# Altium PCB Charger.PcbDoc
Units mil, origin at the board's own origin, x right, y up, seen from the top; angles counter-clockwise.
Board outline 18000 x 5125 mil, 2 copper layers (Top Layer, Bottom Layer); 95 components, 66 nets, 397 pads, 99 vias.
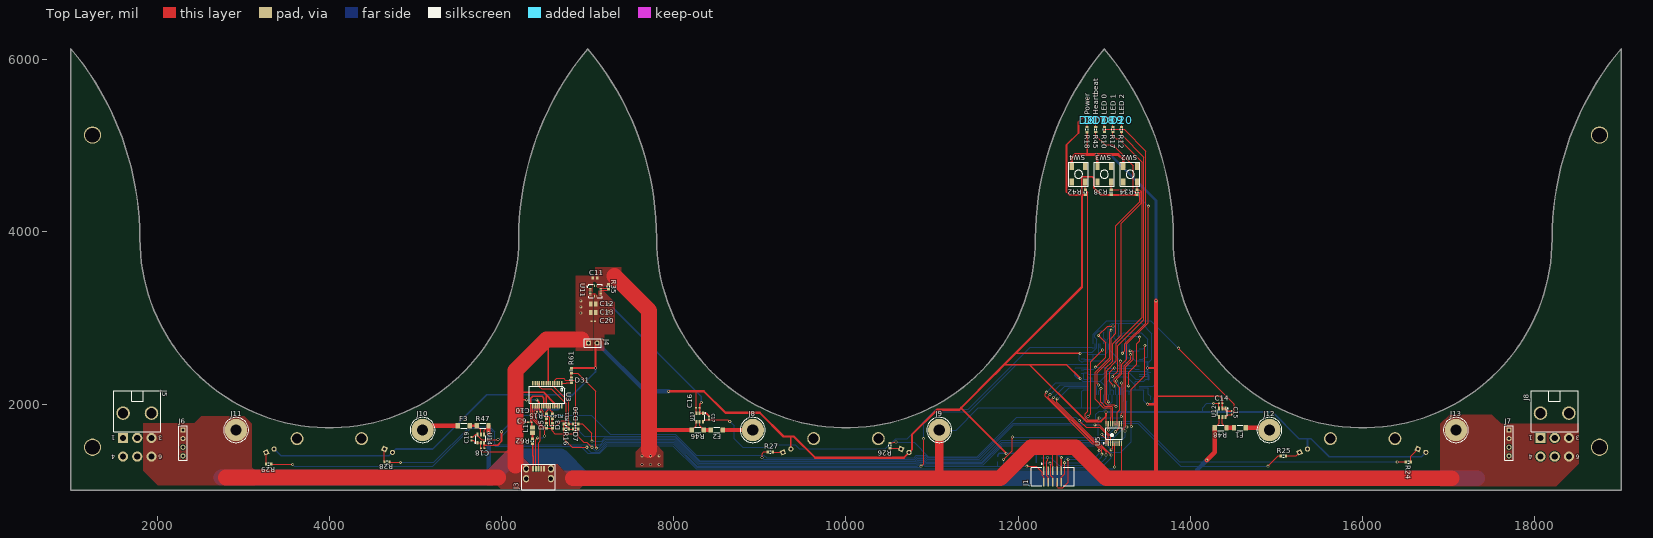
[diagram p0: Top Layer view]
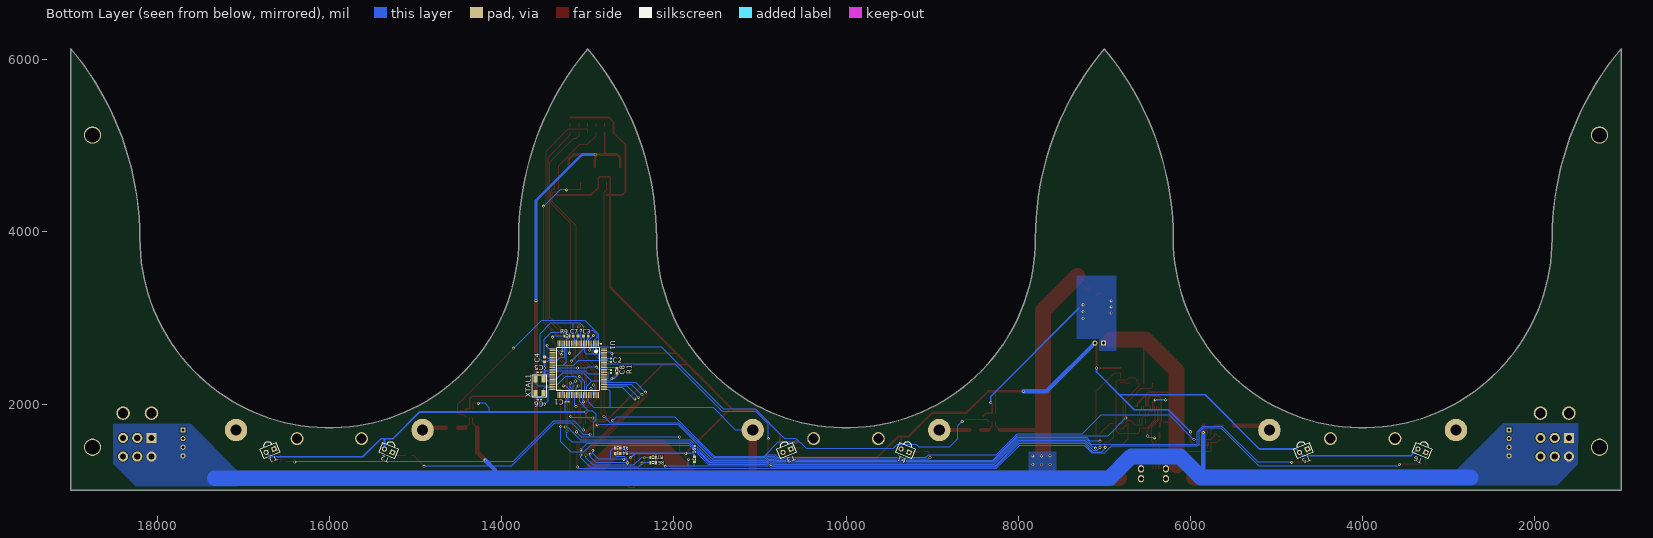
[diagram p1: Bottom Layer view, seen from below]

## Layer stack, top to bottom
Top Layer: signal copper 1.4
Dielectric: core 12.6, FR-4, Dk 4.8
Bottom Layer: signal copper 1.4

## Board outline
343 vertices, not listed, extent 1000,1000 19000,6125

## Design rules (kind name [scope] priority, off if disabled: settings)
Clearance "Via to Pad Clearance" [(InPadClass('All Pads')) vs IsVia] p1: gap=20
Clearance [All] p2: gap=8
ComponentClearance [All] p1: gap=10 collisioncheckmode=3 verticalgap=10 showdistances=TRUE
HoleSize [All] p1: absolutevalues=TRUE maxlimit=250 minlimit=20 maxpercent=80.000 minpercent=20.000
MinimumAnnularRing [All] p1: minimumring=7
MinimumSolderMaskSliver [All] p1: minsoldermaskwidth=0
PolygonConnect PolygonConnect_2 [All] p1: connectstyle=Direct reliefconductorwidth=10 reliefentries=4 polygonreliefangle="90 Angle"
PolygonConnect PolygonConnect_1 [InNet('5V')] p2 off: connectstyle=Direct reliefconductorwidth=10 reliefentries=4 polygonreliefangle="90 Angle"
PolygonConnect [All] p3 off: connectstyle=Relief reliefconductorwidth=10 reliefentries=4 polygonreliefangle="90 Angle"
RoutingVias [All] p1: holewidth=20 width=35 viastyle="Through Hole" minholewidth=20 minwidth=35 maxholewidth=20 maxwidth=35
SMDNeckDown [All] p1: percent=100.000
ShortCircuit [All] p1: allowed=TRUE
SilkToSilkClearance [All] p1: silktosilkclearance=0.5
SilkscreenOverComponentPads [All] p1: minsilkscreentomaskgap=1
SolderMaskExpansion [All] p1: expansion=4
Width "Schematic Width Constraint_10" [InNet('NetF1_1')] p1: maxlimit=100 minlimit=8 preferedwidth=30 minimp=50.000000 maximp=50.000000 favimp=50.000000
Width "Schematic Width Constraint_4" [InNet('NetF3_1')] p2: maxlimit=100 minlimit=8 preferedwidth=30 minimp=50.000000 maximp=50.000000 favimp=50.000000
Width "Schematic Width Constraint_11" [InNet('5V_STATION_0')] p3: maxlimit=100 minlimit=15 preferedwidth=30 minimp=50.000000 maximp=50.000000 favimp=50.000000
Width "Schematic Width Constraint_9" [InNet('NetF2_1')] p4: maxlimit=100 minlimit=8 preferedwidth=30 minimp=50.000000 maximp=50.000000 favimp=50.000000
Width "Schematic Width Constraint_3" [InNet('5V_STATION_2')] p5: maxlimit=100 minlimit=15 preferedwidth=30 minimp=50.000000 maximp=50.000000 favimp=50.000000
Width "Schematic Width Constraint_8" [InNet('5V')] p6: maxlimit=250 minlimit=8 preferedwidth=185 minimp=50.000000 maximp=50.000000 favimp=50.000000
Width "Schematic Width Constraint_7" [InNet('GND')] p7: maxlimit=185 minlimit=8 preferedwidth=50 minimp=50.000000 maximp=50.000000 favimp=50.000000
Width "Schematic Width Constraint_6" [InNet('3.3V')] p8: maxlimit=100 minlimit=8 preferedwidth=20 minimp=50.000000 maximp=50.000000 favimp=50.000000
Width "Schematic Width Constraint_5" [InNet('5V_STATION_1')] p9: maxlimit=100 minlimit=15 preferedwidth=30 minimp=50.000000 maximp=50.000000 favimp=50.000000
Width "Schematic Width Constraint_2" [InNet('NetJ3_1')] p10: maxlimit=15 minlimit=8 preferedwidth=8 minimp=50.000000 maximp=50.000000 favimp=50.000000
Width "Schematic Width Constraint_1" [InNet('GND')] p11: maxlimit=15 minlimit=8 preferedwidth=8 minimp=50.000000 maximp=50.000000 favimp=50.000000
Width "Schematic Width Constraint" [InNet('5VUSB')] p12: maxlimit=15 minlimit=8 preferedwidth=8 minimp=50.000000 maximp=50.000000 favimp=50.000000
Width [All] p13: maxlimit=30 minlimit=8 preferedwidth=8 minimp=50.000000 maximp=50.000000 favimp=50.000000
22 further rules are at their usual default settings.

## Classes and differential pairs
component class CPU: C1 C2 C3 C4 C5 C6 C7 C8 J1 R1 R4 R5 R6 R7 R9 R60 U1 XTAL1
component class IRComms: R24 R25 R26 R27 R28 R29 T1 T2 T3 T4 T5 T6
component class LEDsAndButtons: D17 D18 D19 D20 R10 R12 R17 R34 R38 R42 R45 SW2 SW3 SW4
component class PowerAndSense: C11 C12 C13 C14 C15 C16 C17 C18 C19 C20 D8 F1 F2 F3 J4 J5 J6 J7 J8 J9 J10 J11 J12 J13 R18 R35 R46 R47 R48 U11 U12 U13 U14
component class USBHeaders: C9 C10 D3 D5 D7 D30 D31 J3 L1 R11 R14 R15 R16 R61 R62 U3

## Components (designator, comment, footprint, x,y, rotation, side; value= is the part's Value field where it differs from the comment)
C1 "" CAPC1005L 13240,2030 r0 bottom
C2 "" CAPC1005L 12730,2510 r270 bottom
C3 "" CAPC1608L 13020,2790 r180 bottom
C4 "" CAPC1608L 13500,2520 r90 bottom
C5 "" CAPC1005L 13560,2370 r0 bottom
C6 "" CAPC1005L 13560,2050 r180 bottom
C7 "" CAPC1608L 13140,2790 r180 bottom
C8 "" CAPC1005L 12730,2380 r90 bottom
C9 "" CAPC1005L 6330,1790 r0 top
C10 "" CAPC1005L 6430,1910 r180 top
C11 "" CAPC1608L 7085.31,3464.84 r0 top
C12 "" CAPC2012L 7065.31,3164.84 r0 top
C13 "" CAPC2012L 7065.31,3064.84 r0 top
C14 "" CAPC1005L 14350,2010 r180 top
C15 "" CAPC1005L 14480,1900 r270 top
C16 "" CAPC1005L 8280,1960 r180 top
C17 "" CAPC1005L 8410,1840 r270 top
C18 "" CAPC1005L 5780,1490 r0 top
C19 "" CAPC1005L 5650,1600 r90 top
C20 "" CAPC1005L 7065.31,2964.84 r0 top
D3 "TXLED" SurfaceMount(603) 6590,1750 r90 top
D5 "RXLED" SurfaceMount(603) 6520,1750 r90 top
D7 "Diode" SurfaceMount(603) 6860,1710 r180 top
D8 "Power" SurfaceMount(603) 12800,5299.53 r270 top
D17 "White" SurfaceMount(603) 12900,5300 r270 top
D18 "Red" SurfaceMount(603) 13000,5300 r270 top
D19 "Red" SurfaceMount(603) 13100,5300 r270 top
D20 "Red" SurfaceMount(603) 13200,5300 r270 top
D30 "Diode" SurfaceMount(603) 6860,1770 r180 top
D31 "Diode" SurfaceMount(603) 6810,2280 r90 top
F1 "PTC" ERJ8G-1206 14575,1725 r0 top
F2 "PTC" ERJ8G-1206 8500,1700 r0 top
F3 "PTC" ERJ8G-1206 5560,1750 r180 top
J1 "JTAG" JTAG-10 12400,1160 r180 top locked
J3 "USB" "USB Minib (thru-hole)" 6430,1250 r90 top
J4 "External Power" HDR1X2 7010,2710 r0 top
J5 "Power Connector" MOLEX_MINI-FIT_JR_5569_2X3_HORIZ 1770,1500 r180 top
J6 "5V_EXT_1" HDR1X4 2300,1700 r270 top
J7 "5V_EXT_2" HDR1X4 17700,1700 r270 top
J8 "Charge Prong" CHARGING_PRONG 8917,1700 r0 top locked
J8 "Power Connector" MOLEX_MINI-FIT_JR_5569_2X3_HORIZ 18230,1500 r180 top
J9 "Charge Prong" CHARGING_PRONG 11083,1700 r0 top locked
J10 "Charge Prong" CHARGING_PRONG 5083,1700 r0 top locked
J11 "Charge Prong" CHARGING_PRONG 2917,1700 r0 top locked
J12 "Charge Prong" CHARGING_PRONG 14917,1700 r0 top locked
J13 "Charge Prong" CHARGING_PRONG 17083,1700 r0 top locked
L1 "Inductor" INDC2012L 6360,1700 r90 top
R1 "Res3" RESC1608L 12660,2390 r90 bottom
R4 "Res3" RESC1608L 12650,1430 r180 bottom
R5 "Res3" RESC1608L 12650,1490 r180 bottom
R6 "Res3" RESC1608L 12240,1320 r180 bottom
R7 "Res3" RESC1608L 12240,1380 r180 bottom
R9 "Res3" RESC1608L 13240,2790 r180 bottom
R10 "Res3" RESC1608L 13000,5190 r90 top
R11 "Res3" RESC1608L 6750,1770 r0 top
R12 "Res3" RESC1608L 13200,5190 r90 top
R14 "" RESC1608L 6590,1860 r270 top
R15 "" RESC1608L 6520,1860 r270 top
R16 "Res3" RESC1608L 6750,1710 r0 top
R17 "Res3" RESC1608L 13100,5190 r90 top
R18 "Res3" RESC1608L 12800,5189.53 r90 top
R24 "Res3" RESC1608L 16530,1330 r180 top
R25 "Res3" RESC1608L 15080,1400 r180 top
R26 "Res3" RESC1608L 10510,1520 r90 top
R27 "Res3" RESC1608L 9120,1445 r180 top
R28 "Res3" RESC1608L 4670,1330 r0 top
R29 "Res3" RESC1608L 3295,1305 r0 top
R34 "Res3" RESC1608L 13380,4460 r270 top
R35 "Res3" RESC1608L 7240.31,3364.84 r90 top
R38 "Res3" RESC1608L 13080,4460 r270 top
R42 "Res3" RESC1608L 12780,4460 r270 top
R45 "Res3" RESC1608L 12900,5190 r90 top
R46 "Sense Resistor" ERJ8G-1206 8280,1700 r180 top
R47 "Sense Resistor" ERJ8G-1206 5780,1750 r0 top
R48 "Sense Resistor" ERJ8G-1206 14350,1725 r180 top
R60 "Res3" RESC1608L 11760,1360 r90 bottom
R61 "Res3" RESC1608L 6810,2390 r270 top
R62 "Res3" RESC1608L 6360,1570 r90 top
SW2 "BUTTON_0" SwitchTall-TL330 13300,4670 r90 top
SW3 "BUTTON_1" SwitchTall-TL330 13000,4670 r90 top
SW4 "BUTTON_2" SwitchTall-TL330 12700,4670 r90 top
T1 "LN54" LN54 16687,1460 r247.5 bottom locked
T2 "LN54" LN54 15313,1460 r292.5 bottom locked
T3 "LN54" LN54 10687,1460 r247.5 bottom locked
T4 "LN54" LN54 9313,1460 r292.5 bottom locked
T5 "LN54" LN54 4687,1460 r247.5 bottom locked
T6 "LN54" LN54 3313,1460 r292.5 bottom locked
U1 "LM3S8962" LQFP-100 13110,2405 r270 bottom locked
U3 "FT232RL" SSOP-28 6530,2110 r180 top locked
U5 "SN74AHCT595" TSSOP-16 13110,1660 r90 top locked
U11 "EP53A8HQI" "QFN-16 - EP53A8xQI Package" 7090.31,3314.84 r0 top
U12 "SC310A" SOT-23-6 14370,1900 r270 top
U13 "SC310A" SOT-23-6 8300,1845 r270 top
U14 "SC310A" SOT-23-6 5760,1600 r90 top
XTAL1 "8MHz" CRYSTAL 13560,2211 r270 bottom

## Footprints (in the part's own frame and the unit in brackets; to place one, negate y for a bottom-side part, rotate by r counter-clockwise, add the part's x,y. Pads: shape width x height; smd on the part's side, far side on the other; paste and mask are expansions set on the pad)
CAPC1005L [mm] "Chip Capacitor, Body 1.0x0.5mm, IPC High Density"
  rect 0.6x0.5 smd: 1(-0.5,0) 2(0.5,0)
CAPC1608L [mm] "Chip Capacitor, Body 1.6x0.8mm, IPC High Density"
  rect 0.8x0.9 smd: 1(-0.7,0) 2(0.7,0)
CAPC2012L [mm] "Chip Capacitor, Body 2.0x1.3mm, IPC High Density"
  rect 1.1x1.4 smd: 1(-0.75,0) 2(0.75,0)
CHARGING_PRONG [mil] "Plated Charging Screw Hole, 3.2766mm Hole Dia., 6.604mm Pad Dia."
  round 260 hole 129: 1(0,0)
  silkscreen extent -146,-146 146,146
CRYSTAL [mm]
  rect 1.8x1.2 smd: 1(-2,-1.213) 2(2,-1.187) 3(2,1.213) 4(-2,1.187)
  silkscreen extent -3.25,-2.11 3.28,2.11
ERJ8G-1206 [mm] "Chip Resistor, Body 3.2x1.6mm, IPC High Density"
  rect 1.3x1.6 smd: 1(-1.75,0) 2(1.75,0)
  silkscreen extent -0.86,-0.79 0.86,0.79
HDR1X2 [mm] "Connector; Header; 2 Position"
  rect 1.5x1.5 hole 0.889: 1(0,0)
  round 1.5 hole 0.889: 2(2.54,0)
  silkscreen extent -1.27,-1.27 3.81,1.27
HDR1X4 [mm] "Connector; Header; 4 Position"
  rect 1.5x1.5 hole 0.889: 1(0,0)
  round 1.5 hole 0.889: 2(2.54,0) 3(5.08,0) 4(7.62,0)
  silkscreen extent -1.27,-1.27 8.89,1.27
INDC2012L [mm] "Chip Inductor, Body 2.0x1.2mm, IPC High Density"
  rect 1.2x1.4 smd: 1(-0.8,0) 2(0.8,0)
JTAG-10 [mm] "Connector, Socket Strip, Double Row, SMT, 20 Position, Vertical, Pitch 2mm, Body 20 x 4 mm (LxW)"
  rect 0.44x2.5 smd: 1(-2.56,-1.73) 2(-2.56,1.73) 3(-1.28,-1.73) 4(-1.28,1.73) 5(0,-1.73) 6(0,1.73) 7(1.28,-1.73) 8(1.28,1.73) 9(2.56,-1.73) 10(2.56,1.73)
  silkscreen extent -6.35,-3.86 6.35,2.77
LN54 [mil]
  rect 60x60 hole 35: 1(0,50)
  round 60 hole 35: 2(0,-50)
  silkscreen extent -110,-100 60,100
LQFP-100 [mm] "100-Pin LQFP Package"
  rect 1.75x0.29 smd: 1(-7.575,6) 2(-7.575,5.5) 3(-7.575,5) 4(-7.575,4.5) 5(-7.575,4) 6(-7.575,3.5) 7(-7.575,3) 8(-7.575,2.5) 9(-7.575,2) 10(-7.575,1.5) 11(-7.575,1) 12(-7.575,0.5) 13(-7.575,0) 14(-7.575,-0.5) 15(-7.575,-1) 16(-7.575,-1.5) 17(-7.575,-2) 18(-7.575,-2.5) 19(-7.575,-3) 20(-7.575,-3.5) 21(-7.575,-4) 22(-7.575,-4.5) 23(-7.575,-5) 24(-7.575,-5.5) 25(-7.575,-6) 51(7.575,-6) 52(7.575,-5.5) 53(7.575,-5) 54(7.575,-4.5) 55(7.575,-4) 56(7.575,-3.5) 57(7.575,-3) 58(7.575,-2.5) 59(7.575,-2) 60(7.575,-1.5) 61(7.575,-1) 62(7.575,-0.5) 63(7.575,0) 64(7.575,0.5) 65(7.575,1) 66(7.575,1.5) 67(7.575,2) 68(7.575,2.5) 69(7.575,3) 70(7.575,3.5) 71(7.575,4) 72(7.575,4.5) 73(7.575,5) 74(7.575,5.5) 75(7.575,6)
  rect 0.29x1.75 smd: 26(-6,-7.575) 27(-5.5,-7.575) 28(-5,-7.575) 29(-4.5,-7.575) 30(-4,-7.575) 31(-3.5,-7.575) 32(-3,-7.575) 33(-2.5,-7.575) 34(-2,-7.575) 35(-1.5,-7.575) 36(-1,-7.575) 37(-0.5,-7.575) 38(0,-7.575) 39(0.5,-7.575) 40(1,-7.575) 41(1.5,-7.575) 42(2,-7.575) 43(2.5,-7.575) 44(3,-7.575) 45(3.5,-7.575) 46(4,-7.575) 47(4.5,-7.575) 48(5,-7.575) 49(5.5,-7.575) 50(6,-7.575) 76(6,7.575) 77(5.5,7.575) 78(5,7.575) 79(4.5,7.575) 80(4,7.575) 81(3.5,7.575) 82(3,7.575) 83(2.5,7.575) 84(2,7.575) 85(1.5,7.575) 86(1,7.575) 87(0.5,7.575) 88(0,7.575) 89(-0.5,7.575) 90(-1,7.575) 91(-1.5,7.575) 92(-2,7.575) 93(-2.5,7.575) 94(-3,7.575) 95(-3.5,7.575) 96(-4,7.575) 97(-4.5,7.575) 98(-5,7.575) 99(-5.5,7.575) 100(-6,7.575)
  silkscreen extent -7.7,-6.3 6.3,6.82
MOLEX_MINI-FIT_JR_5569_2X3_HORIZ [mm] "Molex Mini-Fit Jr 5569 Shrouded Rectangular Male Header, Through Hole, Right Angle, 2X3 Pins with Board Lock"
  rect 3x3 hole 1.8: 1(4.2,-2.75)
  round 3 hole 1.8: 2(0,-2.75) 3(-4.2,-2.75) 4(4.2,2.75) 5(0,2.75) 6(-4.2,2.75)
  round 4 hole 3: c0(-4.2,-10.05) c1(4.2,-10.05)
  silkscreen extent -6.9,-16.65 6.9,-4.5, body extent -6.88,-16.66 6.88,-3.84, height 10
"QFN-16 - EP53A8xQI Package" [mm] "EP53A8xQI Package, QFN, 16-Leads, Body 3.7x4.2mm (max), Pitch 0.50mm, IPC Medium Density"
  oval 0.8x0.25 smd: 1(-1.55,1.25) 2(-1.55,0.75) 3(-1.55,0.25) 4(-1.55,-0.25) 5(-1.55,-0.75) 6(-1.55,-1.25) 9(1.55,-1.25) 10(1.55,-0.75) 11(1.55,-0.25) 12(1.55,0.25) 13(1.55,0.75) 14(1.55,1.25)
  oval 0.25x0.8 smd: 7(-0.25,-1.55) 8(0.25,-1.55) 15(0.25,1.55) 16(-0.25,1.55)
  silkscreen extent -2.51,-2 2,2, body extent -1.5,-1.5 1.5,1.5, height 1.15
RESC1608L [mm] "Chip Resistor, Body 1.6x0.8mm, IPC High Density"
  rect 0.7x0.9 smd: 1(-0.75,0) 2(0.75,0)
  silkscreen extent -0.2,-0.35 0.2,0.35
SOT-23-6 [mm] "SOT23, 6-Leads, Body 3.0x2.5mm (max), Pitch 0.95mm, IPC Medium Density"
  rect 1.1x0.6 smd: 1(-1.25,0.95) 2(-1.25,0) 3(-1.25,-0.95) 4(1.25,-0.95) 5(1.25,0) 6(1.25,0.95)
  silkscreen extent -1.42,-1.5 0.87,1.78
SSOP-28 [mm]
  rect 0.44x1.37 smd: 1(-4.225,-3.415) 2(-3.575,-3.415) 3(-2.925,-3.415) 4(-2.275,-3.415) 5(-1.625,-3.415) 6(-0.975,-3.415) 7(-0.325,-3.415) 8(0.325,-3.415) 9(0.975,-3.415) 10(1.625,-3.415) 11(2.275,-3.415) 12(2.925,-3.415) 13(3.575,-3.415) 14(4.225,-3.415) 15(4.225,3.415) 16(3.575,3.415) 17(2.925,3.415) 18(2.275,3.415) 19(1.625,3.415) 20(0.975,3.415) 21(0.325,3.415) 22(-0.325,3.415) 23(-0.975,3.415) 24(-1.625,3.415) 25(-2.275,3.415) 26(-2.925,3.415) 27(-3.575,3.415) 28(-4.225,3.415)
  silkscreen extent -5.25,-2.5 5.25,2.5
SurfaceMount(603) [mm]
  rect 0.7x0.9 smd: 1(-0.75,0) 2(0.75,0)
  silkscreen extent -0.2,-0.35 0.2,0.35
SwitchTall-TL330 [mil] "Small SMDTall Tact Switch E-Switch TL330"
  rect 80x50 smd: 1(-90,80) 2(90,80) 3(-90,-80) 4(90,-80)
  silkscreen extent -141,-114 141,115
TSSOP-16 [mm] "DEMUX & SHIFT REGISTER"
  rect 1.7x0.35 smd: 1(-2.85,2.275) 2(-2.85,1.625) 3(-2.85,0.975) 4(-2.85,0.325) 5(-2.85,-0.325) 6(-2.85,-0.975) 7(-2.85,-1.625) 8(-2.85,-2.275) 9(2.85,-2.275) 10(2.85,-1.625) 11(2.85,-0.975) 12(2.85,-0.325) 13(2.85,0.325) 14(2.85,0.975) 15(2.85,1.625) 16(2.85,2.275)
  silkscreen extent -2.97,-2.49 1.73,3.12
"USB Minib (thru-hole)" [mm]
  rect 1.65x0.55 smd: 1(0,1.6) 2(0,0.8) 3(0,0) 4(0,-0.8) 5(0,-1.6)
  oval 2.2x1.8 hole 1.321: 6(0,3.65) 7(-2.9,3.65) 8(-2.9,-3.65) 9(0,-3.65)
  silkscreen extent -6.2,-4.95 1.39,4.95, body extent -6.17,-3.94 0,3.66, height 4

## Part data
C1 C2 C3 C4 C5 C6 C7 C8 C9 C10 C11 C12 C13 C14 C15 C16 C17 C18 C19 C20: library part Cap, "Capacitor"
D3 D5: library part LED2, "Typical RED, GREEN, YELLOW, AMBER GaAs LED"
D7 D30 D31: library part SchottkeyDiode
D8 D17 D18 D19 D20: library part LED
F1 F2 F3: library part PTC_FUSE, "Fuse"
J1: library part "Header 5X2H", "Header, 5-Pin, Dual row, Right Angle"
J3: library part USB-ConnTH
J4: library part "Header 2", "Header, 2-Pin"
J5 J8: library part MOLEX_MINI_FIT_JR_2X3
J6 J7: library part "Header 4", "Header, 4-Pin"
J8 J9 J10 J11 J12 J13: library part CHARGE_PRONG, "Charging Prong Hole with Plating"
R1 R4 R5 R6 R7 R9 R10 R11 R12 R16 R17 R18 R24 R25 R26 R27 R28 R29 R34 R35 R38 R42 R45 R60 R61 R62: "Resistor"
R14 R15: library part Res1, "Resistor"
R46 R47 R48: library part Resistor, "Resistor"
SW2 SW3 SW4: library part Switch-TL330
U5: "shift register"
U11: "DC/DC Converter with Integrated Inductor"
U12 U13 U14: "High-Side Current-Sense Amplifier with Low Impedance Voltage Output"
XTAL1: library part Crystal

## Free pads (board coordinates)
  round 200 hole 170: 0(1250,1500) 0(1250,5125) 0(18750,1500) 0(18750,5125)
  round 150 hole 116: 0(3625,1600) 0(4375,1600) 0(9625,1600) 0(10375,1600) 0(15625,1600) 0(16375,1600)

## Via types
v1: diameter 35, hole 20, Top Layer to Bottom Layer, 99 vias

## Nets (pads, with @x,y where several pads share a name; then routed paths per layer and width w, separated by ;. In a path a pad name is that pad's centre, name@x,y a point inside that pad or via, vN(x,y) a via of type N, cw(c..) or ccw(c..) an arc to the next point about the centre after c; other vN are vias at no path point)
3.3V: C1.2 C2.2 C3.2 C4.2 C12.2 C13.2 C14.2 C16.2 C18.2 C20.2 D8.1 D17.1 D18.1 D19.1 D20.1 J1.1 J4.2 R1.1 R4.2 R5.2 R6.2 R7.2 R9.2 R34.2 R38.2 R42.2 R60.2 R61.1 T1.2 T2.2 T3.2 T4.2 T5.2 T6.2 U1.3 U1.8 U1.20 U1.32 U1.36 U1.44 U1.56 U1.68 U1.81 U1.83 U1.84 U1.93 U1.98 U5.16 U11.5 U11.7 U11.8 U12.3 U13.3 U14.3 | length 30867.9
  Top Layer w8: U14.3 U14.3@5799.69,1548.5 ; C18.2 5799.69,1524 ; U11.5 7029.76,3284.84 7075.31,3284.84 7080.47,3279.69 U11.7
  Top Layer w10: 8260,2150 8260.31,2149.69 C16.2 8260.31,1896.5 U13.3 ; 13020,1860 13020.43,1859.57 U5.16
  Top Layer w12: v1(14270,2010) C14.2 14330.31,1951.5 U12.3
  Top Layer w15.59: 11729,2350 11729.79,2350.79
  Top Layer w17.32: 11339,1960 11339,1951 v1(11860,1430) ; J1.1 v1(12500.79,1379.21)
  Top Layer w20: U14.3 5797.4,1524 5799.69,1524 5954,1524 6000,1570 v1(6000,1680) ; R61.1 v1(7090,2419.53) 7090,2690 J4.2 ; T4.2 9360,1479.94 9360,1625 ; 11839,2460 11840,2459 12131,2459 12790,1800 12960,1800 13020,1860 13020,1909.57 v1(13020.43,1910) ; 11969,2590 v1(12720,2590) ; 12141,2459 12561,2459 v1(12720,2300) ; R42.2 12740,4430.47 12737,4430.47 ; D20.1 D19.1 D18.1 D17.1 12899.53,5329.06 D8.1 12749.06,5329.06 12700,5280 12700,5150 12561,5011 12561,4464 12594.53,4430.47 12737,4430.47 ; R34.2 R38.2 12959.53,4430.47 12877,4513 12877,4624 12860,4641 12746,4641 12737,4632 12737,4430.47
  Top Layer w25: v1(7940,2150) 8260,2150 8350,2150 8600,1900 9000,1900 9275,1625 9360,1625 9395,1625 9642,1378 10670.33,1378 10765,1472.67 10765,1645 11056,1936 11315,1936 11339,1960 11729,2350 ; 11729.79,2350.79 11839,2460 11969,2590 12740,3361 12740,4430.47
  Bottom Layer w10: C3.2 12992.44,2767.56 13011.57,2748.43 U1.8 ; U1.56 13247.8,2041.89 C1.2 13259.69,1910.31
  Bottom Layer w10.28: v1(12720,2300) 12720,2297.2 12750,2267.2 U1.81 12860,2267.2 ; U1.83@12811,2306.57 U1.83 ; U1.84@12811,2326.26 U1.84 U1.83 ; C3.2 12992.44,2827.56 12970,2850 12936.67,2850 12890.92,2804.25 12890.92,2779.08 12913.15,2756.85 U1.3 12913.15,2656 12859,2601.85 U1.98 12731.85,2601.85 v1(12720,2590) 12707.02,2577.02 12707.02,2512.43 12729.14,2490.31 C2.2 12750.89,2490.31 12764,2503.43 U1.93 13108.29,2503.43 13167.35,2444.37 13290.63,2444.37 ; U1.68 13011.57,2209.11 12953.48,2267.2 ; R9.2 13210.47,2768 13219.47,2759 13238,2759 13247.8,2749.2 U1.20 13247.8,2487.2 13290.63,2444.37 ; U1.44 13365.64,2286.89 13292.53,2360 13046.27,2360 12953.48,2267.2 ; U1.36 13290.63,2444.37 ; U1.83 12860,2306.57 12860,2267.2 ; 12860,2267.2 12953.48,2267.2
  Bottom Layer w11: U1.32 13448.11,2523.11 13472.56,2547.56 C4.2
  Bottom Layer w12: 14140,1910 14140,1910.31 14140,1960 14190,2010 v1(14270,2010)
  Bottom Layer w13: R9.2 13210.47,2816.47 13223.17,2829.17 13429.83,2829.17 13502,2757 13502,2549.56 C4.2
  Bottom Layer w17.32: R60.2 11760,1410 11780,1430 v1(11860,1430) 12210,1430 ; R6.2 R7.2 12210.47,1429.53 12210,1430 ; v1(12500.79,1379.21) 12450,1430 ; R4.2 12520,1430 ; R5.2 12580,1490 12520,1430 ; 12210,1430 12450,1430 ; 12450,1430 12520,1430
  Bottom Layer w20: T6.2 3438.33,1400 4692.33,1400 4772.33,1480 5200,1480 5830,2110 6826.53,2110 ; v1(6000,1680) 6256,1936 6652.53,1936 6826.53,2110 ; v1(7090,2419.53) 7090,2373.47 6826.53,2110 ; R1.1 12660,2330 12690,2300 v1(12720,2300) ; v1@13021.67,1911.24 v1(13020.43,1910) 13180,1910 13180.31,1910.31 13259.69,1910.31 14139.69,1910.31 ; 14140,1910 14139.69,1910.31 ; T2.2 15359.19,1600 ; T1.2@16735,1442.67 T1.2 16682.33,1390 15610,1390 15400,1600 15359.19,1600 ; 14139.69,1910.31 14140,1910.31 14949.69,1910.31 15260,1600 15359.19,1600
  Bottom Layer w50: J4.2 7670,2150 v1(7940,2150)
3.3V_FTDI: C10.2 D3.1 D5.1 R11.1 R16.1 U1.91 U3.4 U3.17 | length 8830
  Top Layer w8: U3.17 6414.84,1914.53 C10.2 6410.31,1819.69 6509.53,1720.47 D5.1 D3.1 6590,1689 6620,1659 6720.47,1659 ; U3.4 6619.57,2279.57 6640,2300 6720,2300 6740,2280 6847,2280 6860,2267 6860,1691 6828,1659 6720.47,1659 ; R11.1 R16.1 6720.47,1659 ; v1(6990,1500) 6821,1500 6720.47,1600.53 6720.47,1659 ; v1(10870,1280) 10900,1310 v1(10900,1600)
  Bottom Layer w8: v1(6990,1500) 6990,1489 7034.5,1444.5 7131.87,1444.5 7227.37,1540 7994.24,1540 8137.37,1396.86 8268.24,1266 10856,1266 v1(10870,1280) ; v1(10900,1600) 10900,1770 11040,1910 11430,1910 11984.06,2464.06 U1.91
5V: C11.2 J5.1 J5.4 J6.3 J6.4 J7.3 J7.4 J8.1@18064.65,1608.27 J8.4 R35.2 R46.2 R47.2 R48.2 U11.14 U12.4 U13.4 U14.4 | length 19148.6
  Top Layer w8: U14.4@5800,1651.81 U14.4 5797.4,1698.5 R47.2 ; R35.2@7240,3394.68 R35.2 ; R46.2 8262.6,1751.5 U13.4 ; R48.2 14332.6,1776.5 U12.4
  Top Layer w50: R47.2 5848.9,1671.1 v1(5850,1670) ; 7714.7,1705 7719.7,1700 R46.2 ; v1(14190,1350) 14281.1,1441.1 R48.2
  Top Layer w185: 7310,3490 7714.7,3085.3 7714.7,1705 7714.7,1465.3
  Bottom Layer w50: v1(5850,1670) 5850,1180 5880,1150 ; 14080,1140 14080,1240 v1(14190,1350)
  Bottom Layer w185: 2750,1150 5880,1150 6123.81,1393.81 6686.19,1393.81 6940,1140 14080,1140 17330,1140
  other v1: 7630,1300 7730,1300 7830,1300 7630,1400 7730,1400 7830,1400
5V_STATION_0: F1.2 J12.1 | length 283.5
  Top Layer w50: F1.2 14892,1725 J12.1
5V_STATION_1: F2.2 J8.1@8917,1700 | length 348.1
  Top Layer w50: F2.2 J8.1@8917,1700
5V_STATION_2: F3.2 J10.1 | length 428.8
  Top Layer w50: J10.1 5133,1750 F3.2
5VUSB: C9.2 L1.2 U3.20 | length 608.9
  Top Layer w15: L1.2 6349.69,1741.81 C9.2 6339.5,1800.19 6339.5,2069.5 6360,2090 6470,2090 6491.61,2068.39 U3.20
BUTTON_0: R34.1 SW2.3 U1.61 | length 3053.6
  Top Layer w8: v1(13134.63,1971.37) 13112.43,1993.57 13032.43,1993.57 13012,2014 13012,2417.49 13095,2500.49 13095,2701.8 13193.83,2800.63 13193.83,4099.33 13426,4331.5 13426,4469.53 13406,4489.53 R34.1 SW2.3
  Bottom Layer w8: v1(13134.63,1971.37) 13149.37,1986.11 U1.61
BUTTON_1: R38.1 SW3.3 U1.60 | length 2954.2
  Top Layer w8: SW3.3 R38.1 v1(13244,4489.53) ; v1(13144,2270) 13144,2294 13202,2352 13202,2464 13262.69,2524.69 13262.69,2699.69 13510,2947 v1(13510,4300)
  Bottom Layer w8: v1(13144,2270) 13169.06,2244.94 U1.60 ; v1(13244,4489.53) 13320.47,4489.53 v1(13510,4300)
BUTTON_2: R42.1 SW4.3 U1.59 | length 3736.8
  Top Layer w8: SW4.3 R42.1 12810,4459.53 12810,1920 12780,1890 12780,1847 12805,1822 12922,1822 v1(12940,1840) ; v1(13197,1857) 13197,1889 13206,1898 13206,2240 v1(13201,2245)
  Bottom Layer w8: v1(12940,1840) 13180,1840 13190,1850 v1(13197,1857) ; U1.59 13188.74,2184 13201,2196.26 v1(13201,2245)
FTDI_RX: D31.2 R61.2 U1.26 | length 8923.7
  Top Layer w8: D31.2 R61.2 6884,2360.47 7093,2151.47 7093,1497 v1(7100,1490) ; v1(13314,1742) 13314,2174 13470,2330 v1(13470,2680)
  Bottom Layer w8: v1(7100,1490) 7110,1500 7137.37,1500 7213.37,1576 8003.49,1576 8281.49,1298 10823.65,1298 10851.15,1325.5 10888.85,1325.5 10918.35,1296 11591.25,1296 11815.25,1520 12970,1520 13050,1440 13188.28,1440 13314,1565.72 v1(13314,1742) ; U1.26@13407.22,2640 13406,2641.22 U1.26 13451.22,2641.22 13470,2660 v1(13470,2680)
FTDI_TX: D30.1 U1.27 | length 7875.9
  Top Layer w8: D30.1 6940,1770 7050,1660 v1(7050,1570) ; v1(13240,1689) 13240,1691 13229,1702 13229,2147.46 13233.06,2151.51 13233.06,2449.01 13304,2519.95 v1(13304,2575.54)
  Bottom Layer w8: v1(7050,1570) 7162.12,1570 7200.12,1608 8016.75,1608 8201.37,1423.37 8294.74,1330 10810.4,1330 10837.9,1357.5 10902.1,1357.5 10931.6,1328 11578,1328 11810,1560 13180,1560 13240,1620 v1(13240,1689) ; v1(13304,2575.54) 13350,2621.54 U1.27
GND: C1.1 C2.1 C3.1 C4.1 C5.1 C6.1 C7.1 C8.1 C9.1 C10.1 C11.1 C12.1 C13.1 C14.1 C15.1 C16.1 C17.1 C18.1 C19.1 C20.1 J1.3 J1.5 J1.9 J3.4 J3.5 J3.6 J3.7 J3.8 J3.9 J4.1 J5.3 J5.6 J6.1 J6.2 J7.1 J7.2 J8.3 J8.6 J9.1 J11.1 J13.1 R18.1 SW2.2 SW3.2 SW4.2 U1.4 U1.9 U1.15 U1.21 U1.33 U1.39 U1.41 U1.42 U1.45 U1.50 U1.54 U1.57 U1.63 U1.65 U1.69 U1.76 U1.82 U1.85 U1.86 U1.87 U1.94 U1.97 U3.7 U3.18 U3.21 U3.25 U3.26 U5.8 U11.2 U11.3 U11.6 U11.9 U11.10 U11.11 U12.1 U12.2 U13.1 U13.2 U14.1 U14.2 XTAL1.2 XTAL1.4 | length 36129.9
  Top Layer w8: C19.1 5669.68,1580.32 5699.21,1550.79 U14.1 U14.2 U14.2@5760.32,1550.47
  Top Layer w12: U14.2 5760,1490.32 C18.1 5760.32,1459.68 5770,1450 6160,1450 ; J1.9 12299.21,1499.21 ; J1.5 12400,1500 ; J1.3 12450.39,1499.61 ; 13199.57,1140.43 U5.8
  Top Layer w15: U13.2@8299.68,1894.53 C16.1 8299.68,1999.68 v1(8320,2020) ; U13.2 U13.1 8375.47,1894.21 C17.1
  Top Layer w15.59: 6160,2050 v1(6290,2050) ; 6180,2140 6487.57,2140 6619.57,2008 U3.25 ; v1(6410,2050) 6440.43,2019.57 U3.18 6440.43,1933.6 6447,1927.03 C10.1@6447,1910 ; U3.21 6517.2,2110 ; U3.7 6542.8,2727.2 ; U3.25@6619.57,1975 6645.16,1975 U3.26 ; 12800,4900 R18.1 ; 13600,2090 14340,2090 14369.68,2060.32 C14.1 14370,2009.68 U12.2 U12.1 14407.4,1932.6 14420.32,1919.68 C15.1
  Top Layer w17.72: 6160,1790 C9.1 ; C10.1@6447,1910 C10.1
  Top Layer w21.26: U12.2@14370,1949 U12.2
  Top Layer w25: v1(13500,2000) 13600,2000 ; v1(13500,2420) 13600,2420
  Top Layer w30: SW4.2 12620,4860 12660,4900 12800,4900 v1(12910.05,4900) ; SW3.2 12920,4830 12910.05,4839.95 v1(12910.05,4900) ; SW2.2 13220,4840 13160,4900 v1(12910.05,4900)
  Top Layer w50: 7385,1179 7424,1140 7440,1140 ; 13600,1140 13600,2000 13600,2090 13600,2420 v1(13600,3200)
  Top Layer w100: 11083,1143 J9.1
  Top Layer w185: 2800,1150 5960,1150 ; 6160,1290 6160,1450 6160,1790 6160,2050 6160,2390 6520,2750 6930,2750 ; 6830,1140 7424,1140 ; 7440,1140 11790,1140 12150,1500 12400,1500 12663.12,1500 13023.12,1140 13600,1140 17030,1140
  Bottom Layer w10: 13260,2320 13360,2220 ; 13310.11,2168.78 13359.17,2168.78 U1.50 13451.22,2168.78 13460,2160 13460,2040 v1(13500,2000)
  Bottom Layer w10.28: J9.1 11280,1700 11536,1956 12740,1956 ; C8.1 12760.32,2360.32 ; C2.1 12764,2529.68 12770.57,2523.11 U1.94 12862,2523.11 12870,2531.11 12870,2574.17 12862,2582.17 ; U1.76 12758.78,2168.78 12740,2150 12740,1956 ; U1.82 12764.14,2286.89 12760,2291.03 12760,2360 12760.32,2360.32 ; U1.86 U1.86@12811,2365.63 ; U1.87 12811,2385.31 U1.86@12811,2365.63 ; U1.97 12862,2582.17 ; U1.4 12932.83,2582.17 ; U1.69 12991.89,2025.89 12922,1956 12740,1956 ; C3.1 13047.56,2765.04 13031.26,2748.74 U1.9 13031.26,2601.26 13012.17,2582.17 12932.83,2582.17 ; U1.65 13070.63,2160.63 ; U1.63 13110,2160 13100,2170 13080,2170 13070.63,2160.63 ; U1.15 13149.37,2751.37 13167.56,2769.56 C7.1 ; C1.1 13228.11,2037.79 U1.57 13228.11,2155 13278,2155 13287.17,2145.83 ; 13260,2320 13136.67,2320 13070.63,2253.96 13070.63,2160.63 ; U1.21 13267.48,2539.05 13325.37,2539.05 13361,2503.43 U1.33 13456.57,2503.43 13470,2490 13497.56,2490 C4.1 ; U1.54 13287.17,2145.83 ; 13310.11,2168.78 13287.17,2145.83 ; 13359.17,2168.78 13360,2169.61 13360,2220 13360,2260 13367.2,2267.2 U1.45 13460,2267.2 13482.54,2289.74 XTAL1.4 ; U1.42 13502.77,2326.26 13513.26,2336.74 ; U1.41 13495.94,2345.94 13500,2350 ; 13495.31,2385.31 U1.39 13025.31,2385.31 12985.94,2345.94 U1.85 12811,2345.94 U1.86@12811,2365.63 ; 13500,2370 C5.1 ; 12760.32,2360.32 12765.63,2365.63 U1.86@12811,2365.63 ; 12862,2582.17 12932.83,2582.17
  Bottom Layer w12: C3.1 13047.56,2898.11 13087.95,2938.5 13167,2938.5 ; C7.1 13167,2790.56 13167,2938.5 ; C4.1 13522.44,2492.44 13550,2520 13550,2820 13431.5,2938.5 13167,2938.5
  Bottom Layer w15: v1(13500,2000) 13550,2000 13580,2030 13580,2049.68 C6.1 13579.68,2069.68 13606.74,2096.74 XTAL1.2
  Bottom Layer w15.59: v1(6290,2050) v1(6410,2050)
  Bottom Layer w20: 7290,3120 8320,2090 v1(8320,2020)
  Bottom Layer w25: C4.1@13497.56,2490 13500,2487.56 v1(13500,2420) 13500,2370 13500,2350 13513.26,2336.74 XTAL1.4
  Bottom Layer w28.35: C7.1@13167,2790 C7.1
  Bottom Layer w30: v1(12910.05,4900) 13063,4900 13600,4363 v1(13600,3200)
  other v1: 7245.31,2994.84 6920,3060 7245.31,3074.84 6920,3130 7245.31,3154.84 6920,3200
IR_EMIT_0: R24.2 U5.15 | length 3760.4
  Top Layer w8: U5.15 13046.02,1703.98 v1(13050,1700) ; v1(16400,1330) R24.2
  Bottom Layer w8: v1(13050,1700) 13150,1800 13400,1800 13870,1330 v1(16400,1330)
IR_EMIT_1: R25.2 U5.1 | length 2513.1
  Top Layer w8: v1(12970,1648) 13020.43,1597.57 U5.1 ; v1(14900,1280) 15020,1400 R25.2
  Bottom Layer w8: v1(12970,1648) 13048,1648 13180,1780 13390,1780 13890,1280 v1(14900,1280)
IR_EMIT_2: R26.2 U5.2 | length 2973.4
  Top Layer w8: R26.2 10539.53,1549.53 10550,1560 v1(10580,1560) ; v1(12710,1810) 12790,1730 12947.37,1730 13046.02,1631.35 U5.2
  Bottom Layer w8: v1(10580,1560) 10790.11,1560 10957.63,1392.48 11522.48,1392.48 11980,1850 12670,1850 v1(12710,1810)
IR_EMIT_3: R27.2 U5.3 | length 4497.2
  Top Layer w8: v1(9025,1380) 9025,1425 9045,1445 R27.2 ; v1(12890,1760) 12940,1760 13071.61,1628.39 U5.3
  Bottom Layer w8: v1(9025,1380) 9043,1362 10797.14,1362 10824.64,1389.5 10915.36,1389.5 10944.86,1360 11550,1360 11950,1760 v1(12890,1760)
IR_EMIT_4: R28.2 U5.4 | length 9098.2
  Top Layer w8: R28.2 4704.53,1325 v1(4825,1325) ; v1(13080,1470) 13097.2,1487.2 U5.4
  Bottom Layer w8: v1(4825,1325) 5215,1325 5630,1740 5862.63,1740 5920,1682.63 5920,1540 5930.5,1529.5 7144.25,1529.5 7206.75,1592 8010.12,1592 8288.12,1314 10817.03,1314 10844.53,1341.5 10895.47,1341.5 10924.97,1312 11584.63,1312 11812.63,1540 13010,1540 v1(13080,1470)
IR_EMIT_5: R29.2 U5.5 | length 10629.4
  Top Layer w8: R29.2 3329.53,1300 v1(3575,1300) ; v1(13120,1270) 13122.8,1272.8 13122.8,1332.8 U5.5
  Bottom Layer w8: v1(3575,1300) 3595,1280 5200,1280 5640,1720 5860,1720 5900,1680 5900,1537.37 5927.37,1510 6920,1510 7001.5,1428.5 7138.5,1428.5 7230,1520 7990,1520 8260,1250 13040,1250 13100,1250 v1(13120,1270)
IR_XMIT_CLK: U1.10 U5.11 U5.12 | length 1084.1
  Top Layer w8: U5.12 U5.11 13148.39,1904.77 13180,1936.39 13180,2192.28 13114.5,2257.78 13114.5,2294.5 13182,2362 13182,2494 v1(13188,2500)
  Bottom Layer w8: U1.10 13050.94,2637.06 v1(13188,2500)
IR_XMIT_DATA: U1.11 U5.14 | length 1453.9
  Top Layer w8: U5.14 13071.61,1848.07 13078,1854.46 13078,1958.43 13076,1960.43 12990,1960.43 12895,2055.43 12895,2372 13063,2540 13063,2843 v1(13080,2860)
  Bottom Layer w8: U1.11 13070.63,2754.63 13080,2764 v1(13080,2860)
IR_XMIT_PWM: U1.72 U5.13 | length 599.9
  Top Layer w8: v1(12960,2180) 12960,2022.43 12962.43,2020 13006,1976.43 13088.77,1976.43 13097.2,1968 U5.13
  Bottom Layer w8: U1.72 12932.83,2156.83 12956,2180 v1(12960,2180)
JTAG_TCK: J1.4 R5.1 U1.80 | length 2556.3
  Top Layer w8: v1(12330,2140) 12312.12,2122.12 12312.12,2090 12862.12,1540 12880,1540 12940,1480 12940,1470 12950,1460 v1(12940,1460) ; J1.4 12450.39,1040.39 12460.11,1030.68 12514.42,1030.68 12580,1096.26 v1(12580,1360)
  Bottom Layer w8: v1(12330,2140) 12437.52,2247.52 U1.80 ; v1(12580,1360) 12730,1360 ; R5.1 12700,1490 12730,1460 12730,1360 ; v1(12940,1460) 12940,1430 12870,1360 12730,1360
JTAG_TDI: J1.8 R7.1 U1.78 | length 2556
  Top Layer w8: v1(12340,1380) 12340,1350 12328.94,1338.94 12328.94,1170.27 12349.61,1149.61 J1.8 ; v1(12410,2080) 12397.37,2067.37 12397.37,2050 12875.37,1572 12895.37,1572 13020,1447.37 v1(13020,1410)
  Bottom Layer w8: R7.1 v1(12340,1380) 12380,1380 12470,1290 12930,1290 13020,1380 v1(13020,1410) ; v1(12410,2080) 12538.15,2208.15 U1.78
JTAG_TDO: J1.6 R6.1 U1.77 | length 2490
  Top Layer w8: v1(12368.5,1314.82) 12379.34,1303.98 12379.34,1170.66 12400,1150 J1.6 ; v1(12453,2062.5) 12445,2054.5 12445,2025 12882,1588 12902,1588 v1(13080,1410)
  Bottom Layer w8: R6.1 12363.32,1320 v1(12368.5,1314.82) 12413.32,1270 12970,1270 13080,1380 v1(13080,1410) ; v1(12453,2062.5) 12460,2055.5 12592.96,2188.46 U1.77
JTAG_TMS: J1.2 R4.1 U1.79 | length 2412.2
  Top Layer w8: v1(12370,2110) 12350,2090 12350,2074.75 12868.75,1556 12888.75,1556 12970,1474.75 v1(12970,1420) ; J1.2 12500.79,1150.79 12540,1190 v1(12540,1320)
  Bottom Layer w8: v1(12370,2110) 12487.83,2227.83 U1.79 ; R4.1 12679.53,1409.62 12660,1390.09 12568.38,1390.09 12540,1361.72 v1(12540,1320) 12900,1320 12970,1390 v1(12970,1420)
LED_GP_0: R10.1 U1.18 | length 3179.8
  Top Layer w8: R10.1 13000,5180 13010,5190 13230,5190 13480,4940 13480,2942 13238,2700 13238,2621.15 v1(13208.43,2591.57)
  Bottom Layer w8: v1(13208.43,2591.57) U1.18
LED_GP_1: R17.1 U1.66 | length 3551.5
  Top Layer w8: v1(13051,2028) 13028,2051 13028,2390 13139.77,2501.77 13139.77,2708.59 13442,3010.82 13442,4808 13170,5080 13140,5080 13100,5120 R17.1
  Bottom Layer w8: U1.66 13050.94,2028.06 v1(13051,2028)
LED_GP_2: R12.1 U1.67 | length 3339
  Top Layer w8: v1(13093,2322) 13155.77,2384.77 13155.77,2677.77 13460,2982 13460,4870 13200,5130 R12.1
  Bottom Layer w8: U1.67 13031.26,2260.26 v1(13093,2322)
LED_HEARTBEAT: R45.1 U1.73 | length 3563.4
  Top Layer w8: R45.1@12903,5160.47 R45.1 12900,5120 13010,5010 13095,5010 13338,4767 13338,4480 13358,4460 13406,4460 13409.72,4456.28 13409.72,4349.72 13133,4073 13133,2821.5 13079,2767.5 13079,2528.61 12915.6,2365.21 12915.6,2238.4 v1(12930,2224)
  Bottom Layer w8: U1.73 12913.15,2207.15 v1(12930,2224)
NetC5_2: C5.2 U1.48 XTAL1.1 | length 349.8
  Bottom Layer w10.28: U1.48 13568.15,2208.15 13607.74,2247.74 XTAL1.1 13607.74,2341.94 C5.2
NetC6_2: C6.2 U1.49 XTAL1.3 | length 247.8
  Bottom Layer w8: U1.49 13501.54,2188.46 13512.26,2177.74 XTAL1.3 13512.26,2117.74 13540.31,2089.69 C6.2
NetD3_2: D3.2 R14.2 | length 50.9
  Top Layer w8: D3.2 R14.2
NetD5_2: D5.2 R15.2 | length 50.9
  Top Layer w8: D5.2 R15.2
NetD7_2: D7.2 R16.2 U3.19 | length 653.4
  Top Layer w8: U3.19 6466.02,1936 6487,1915.02 6487,1872 6499,1860 6540,1860 6560,1840 6560,1753 6643,1753 6695.97,1805.97 6733.03,1805.97 6747,1792 6747,1749 6756,1740 6767.53,1740 6779.53,1728 R16.2 D7.2
NetD8_2: D8.2 R18.2 | length 50.9
  Top Layer w8: R18.2 D8.2
NetD17_2: D17.2 R45.2 | length 50.9
  Top Layer w8: R45.2 D17.2
NetD18_2: D18.2 R10.2 | length 50.9
  Top Layer w8: R10.2 D18.2
NetD19_2: D19.2 R17.2 | length 50.9
  Top Layer w8: R17.2 D19.2
NetD20_2: D20.2 R12.2 | length 50.9
  Top Layer w8: R12.2 D20.2
NetD30_2: D30.2 R11.2 U3.5 | length 602.3
  Top Layer w8: U3.5 6593.98,2215.02 6779.53,2029.47 R11.2 D30.2
NetD31_1: D31.1 U3.1 | length 116.2
  Top Layer w8: U3.1 6750,2244.45 6756.02,2250.47 D31.1
NetF1_1: F1.1 R48.1 U12.5 | length 233.2
  Top Layer w8: U12.5 14370,1773.9 R48.1
  Top Layer w50: R48.1 F1.1
NetF2_1: F2.1 R46.1 U13.5 | length 198.2
  Top Layer w8: U13.5 8300,1748.9 R46.1
  Top Layer w50: R46.1 F2.1
NetF3_1: F3.1 R47.1 U14.5 | length 203.2
  Top Layer w8: R47.1 5760,1701.1 U14.5
  Top Layer w30: F3.1 R47.1
NetJ3_1: J3.1 R62.1 | length 293.4
  Top Layer w15: R62.1 6360,1400 6367.01,1392.99 J3.1
NetL1_1: L1.1 R62.2 | length 69
  Top Layer w20: R62.2 L1.1
NetR1_2: R1.2 U1.89 | length 153.9
  Bottom Layer w8: R1.2 12665.16,2424.68 U1.89
NetR9_1: R9.1 U1.58 | length 916.9
  Top Layer w8: v1(13282,2213) 13282,2370 13374,2462 13374,2702 13410,2738 v1(13410,2778)
  Bottom Layer w8: U1.58 13208.43,2168 13253.43,2213 v1(13282,2213) ; R9.1 13398,2790 v1(13410,2778)
NetR14_1: R14.1 U3.23 | length 95
  Top Layer w8: U3.23 6568.39,1931.61 6590,1910 R14.1
NetR15_1: R15.1 U3.22 | length 95.5
  Top Layer w8: R15.1 6520,1910 6542.8,1932.8 U3.22
NetR24_1: R24.1 T1.1 | length 182.8
  Top Layer w8: R24.1 16560,1330.47 16560,1398.33 T1.1
NetR25_1: R25.1 T2.1 | length 174.2
  Top Layer w8: R25.1 15225.94,1400 T2.1
NetR26_1: R26.1 T3.1 | length 135.5
  Top Layer w8: T3.1@10640.41,1479.53 T3.1
  Top Layer w10: R26.1 10629.47,1490.47 10629.94,1490 T3.1@10640.41,1479.53
NetR27_1: R27.1 T4.1 | length 119
  Top Layer w8: R27.1 9153.66,1440.87 T4.1
NetR28_1: R28.1 T5.1 | length 149.3
  Top Layer w8: R28.1 4640.47,1478.8 T5.1
NetR29_1: R29.1 T6.1 | length 136.4
  Top Layer w8: R29.1 3265.47,1439.53 T6.1
NetR35_1: R35.1 U11.12 U11.13 | length 186.1
  Top Layer w8: U11.12 7229.68,3324.69 R35.1 7231.26,3344.37 U11.13
RESET: D7.1 J1.10 R60.1 U1.64 U5.10 | length 8254.3
  Top Layer w8: D7.1 6889.53,1620.47 6952.22,1557.78 6992.22,1557.78 v1(7050,1500) ; v1(11830,1360) 11831.72,1360 11931.5,1459.78 v1(11931.5,1618.5) ; v1(12100,1280) 12208,1280 12277,1211 12277,1173 12299.21,1150.79 J1.10 ; v1(13130,1680) 13173.98,1723.98 U5.10
  Bottom Layer w8: v1(7050,1500) 7050,1498.28 7087.78,1460.5 7120.5,1460.5 7220,1560 7996.86,1560 8274.86,1282 10830.28,1282 10857.78,1309.5 10882.22,1309.5 10911.72,1280 11760,1280 ; R60.1 11760,1280 ; v1(11830,1360) 11830,1280 ; v1(11931.5,1618.5) 12930,1618.5 ; v1(12100,1280) 11830,1280 ; U1.64 13090.31,2025.59 12984.72,1920 12938.28,1920 12900,1881.72 12900,1818.28 12930,1788.28 12930,1618.5 ; v1(13130,1680) 13068.5,1618.5 12930,1618.5 ; 11760,1280 11830,1280
STATION_SENSE_0: C15.2 U1.1 U12.6 | length 2430.2
  Top Layer w8: v1(13860,2650) 14510,2000 14510,1910.31 C15.2 14436.93,1880.31 U12.6
  Bottom Layer w8: U1.1 12873.78,2813.78 13030,2970 13540,2970 v1(13860,2650)
STATION_SENSE_1: C17.2 U1.2 U13.6 | length 5356.4
  Top Layer w8: U13.6 8361.93,1820.31 C17.2 8629.69,1820.31 v1(8650,1800)
  Bottom Layer w8: v1(8650,1800) 8700,1750 8700,1600 8800,1500 9150,1500 9180,1530 9410,1530 9460,1480 10458.28,1480 10578.28,1600 10710,1600 10884,1774 10884,1776.63 11047.37,1940 11420,1940 12140,2660 12855,2660 12859,2656 12888.91,2656 12893.46,2660.55 U1.2
STATION_SENSE_2: C19.2 U1.5 U14.6 | length 8675
  Top Layer w8: C19.2 5669.69,1619.69 5699.21,1649.21 U14.6 5722.6,1636.18 5768.78,1590 v1(5960,1590) ; v1(12811,1858) 12843,1890 12843,2493 v1(12980,2630)
  Bottom Layer w8: v1(5960,1590) 6240,1870 7039.49,1870 7259.49,1650 8020,1650 8260.5,1409.5 9045.5,1409.5 9077,1378 10790.52,1378 10818.02,1405.5 10921.98,1405.5 10951.48,1376 11536,1376 11940,1780 12733,1780 v1(12811,1858) ; U1.5 12952.52,2657.48 v1(12980,2630)
USB_CTS: U1.22 U3.11 | length 8545
  Top Layer w8: U3.11 6440.43,2205 6465.43,2180 6578,2180 6750,2008 v1(6750,1840) ; v1(13261,1734) 13250,1745 13250,2436 13336.81,2522.81 13336.81,2609.36 13326.17,2620 v1(13300,2620)
  Bottom Layer w8: v1(6750,1840) 6960,1630 8017.37,1630 8301.37,1346 10803.77,1346 10831.27,1373.5 10908.73,1373.5 10938.23,1344 11564,1344 11801.72,1581.72 13081.72,1581.72 13234,1734 v1(13261,1734) ; U1.22 13287.17,2632.83 v1(13300,2620)
USBDM: J3.2 U3.16 | length 856.3
  Top Layer w8: U3.16 6389.25,1932 6380,1922.75 6380,1826 6490.28,1715.72 6490.28,1701.72 6500,1692.01 v1(6500,1630) ; J3.2 6398.5,1588.5 v1(6420,1610)
  Bottom Layer w8: v1(6420,1610) 6480,1610 v1(6500,1630)
USBDP: J3.3 U3.15 | length 769.6
  Top Layer w8: U3.15 6363.66,1819.34 6450,1733 6450,1573 6430,1553 J3.3
VDD25: C7.2 C8.2 U1.7 U1.14 U1.38 U1.62 U1.88 | length 2089.4
  Top Layer w10: v1(12900,2430) 13017.83,2547.83 13017.83,2712.17 v1(12930,2800) 13037,2907 v1(13101,2907) 13101,2904 v1@13098,2904 ; v1(13110,2210) 13060,2260 13060,2369 13111,2420 v1(13120,2420)
  Bottom Layer w10: C8.2 12759.69,2399.69 12765,2405 U1.88 12875,2405 v1(12900,2430) 12999.49,2430 13009.49,2420 v1(13120,2420) 13343,2420 13358,2405 U1.38 ; v1(12930,2800) 12973.92,2756.08 12976.48,2756.08 12991.89,2740.67 U1.7 ; v1(13101,2907) 13112.44,2895.56 C7.2 13112.44,2767.56 13129.69,2750.31 U1.14 ; v1(13110,2210) 13129.69,2190.31 U1.62
pads on no net: J1.7 J5.2 J5.5 J5.c0 J5.c1 J8.2 J8.5 J8.c0 J8.c1 SW2.1 SW2.4 SW3.1 SW3.4 SW4.1 SW4.4 U1.6 U1.12 U1.13 U1.16 U1.17 U1.19 U1.23 U1.24 U1.25 U1.28 U1.29 U1.30 U1.31 U1.34 U1.35 U1.37 U1.40 U1.43 U1.46 U1.47 U1.51 U1.52 U1.53 U1.55 U1.70 U1.71 U1.74 U1.75 U1.90 U1.92 U1.95 U1.96 U1.99 U1.100 U3.2 U3.3 U3.6 U3.8 U3.9 U3.10 U3.12 U3.13 U3.14 U3.24 U3.27 U3.28 U5.6 U5.7 U5.9 U11.1 U11.4 U11.15 U11.16

## Polygon pours and split planes (outlines as drawn)
5V on Bottom Layer "5V_EXT_2_5V" (solid, pour order 24): 18510,1770 17610,1770 17070,1230 17070,1050 18250,1050 18510,1310
5V on Bottom Layer "5V_EXT_1_5V" (solid, pour order 25): 1498.35,1780 2370,1780 2910,1240 2910,1060 1740,1060 1500,1300
GND on Bottom Layer "GND_Plane_Bottom_Square" (solid, pour order 17): 6860,3490 7320,3490 7320,2760 7060,2760 7060,2620 6860,2620
5V on Bottom Layer "5V_Plane_Square_2" (solid, pour order 21): 7560,1450 7880,1450 7880,1110 7560,1110
GND on Top Layer "5V_EXT_1_GND" (solid, pour order 26): 1840,1780 2430,1780 2510,1860 3015,1860 3100,1775 3100,1270 3130,1240 3130,1060 2010,1060 1840,1230
GND on Top Layer "5V_EXT_2_GND" (solid, pour order 23): 18510,1770 17610,1770 17500,1880 17010,1880 16900,1770 16900,1050 18250,1050 18510,1310
5V on Top Layer "5V_Plane_Main" (solid, pour order 15): 7090,3590 7090,3420 7110,3400 7110,3350 7180,3350 7200,3370 7390,3370 7390,3590
GND on Top Layer "GND_Plane_1" (solid, pour order 20): 6860,3490 7080,3490 7080,3430 7060,3410 7060,2620 6860,2620
3.3V on Top Layer "3.3V_Plane_1" (solid, pour order 16): 7090,3290 7190,3190 7190,2620 7070,2620 7070,3290
GND on Top Layer "GND_Plane_Bottom" (solid, pour order 18): 7125.31,3314.84 7125.31,3264.84 7195.31,3194.84 7195.31,2814.84 7315.31,2814.84 7315.31,3184.84 7185.31,3314.84
GND on Top Layer "USB_GND_Plane" (solid, pour order 22): 6440,1210 6350,1210 6350,1280 6130,1500 6100,1500 5840,1240 5840,1060 5950,1060 5990,1020 6910,1020 6950,1060 6950,1230 6720,1230 6650,1300 6440,1300
5V on Top Layer "5V_Plane_Square_1" (solid, pour order 14): 7560,1450 7650,1540 7790,1540 7880,1450 7880,1270 7560,1270

## Silkscreen, mask and mechanical layers (free items; w line width, h text height)
Top Overlay:
  text "Power" at 12830,5360 h60 r90
  text "Heartbeat" at 12930,5360 h60 r90
  text "LED 0" at 13030,5360 h60 r90
  text "LED 1" at 13130,5360 h60 r90
  text "LED 2" at 13230,5360 h60 r90
Top Solder:
  drawing of 354 lines, arcs and shapes, not listed
Bottom Solder:
  drawing of 354 lines, arcs and shapes, not listed
Mechanical 1:
  drawing of 354 lines, arcs and shapes, not listed

## Text inside footprints (layer, text, board x,y; h text height)
J5: Top Overlay "6" at 2061.34,1413.39 h50 r180; Top Overlay "3" at 2061.34,1633.86 h50 r180; Top Overlay "1" at 1514.09,1633.86 h50 r180; Top Overlay "4" at 1514.09,1413.39 h50 r180
J8: Top Overlay "4" at 17974.09,1413.39 h50 r180; Top Overlay "1" at 17974.09,1633.86 h50 r180; Top Overlay "3" at 18521.34,1633.86 h50 r180; Top Overlay "6" at 18521.34,1413.39 h50 r180